# Altium PCB ALIMENTACION FINAL.PcbDoc
Units mm, origin at the board's own origin, x right, y up, seen from the top; angles counter-clockwise.
Board outline 107.98 x 53.29 mm, 2 copper layers (Top Layer, Bottom Layer); 31 components, 18 nets, 67 pads, 0 vias.
Unrouted connection lines stored in the file: 2.
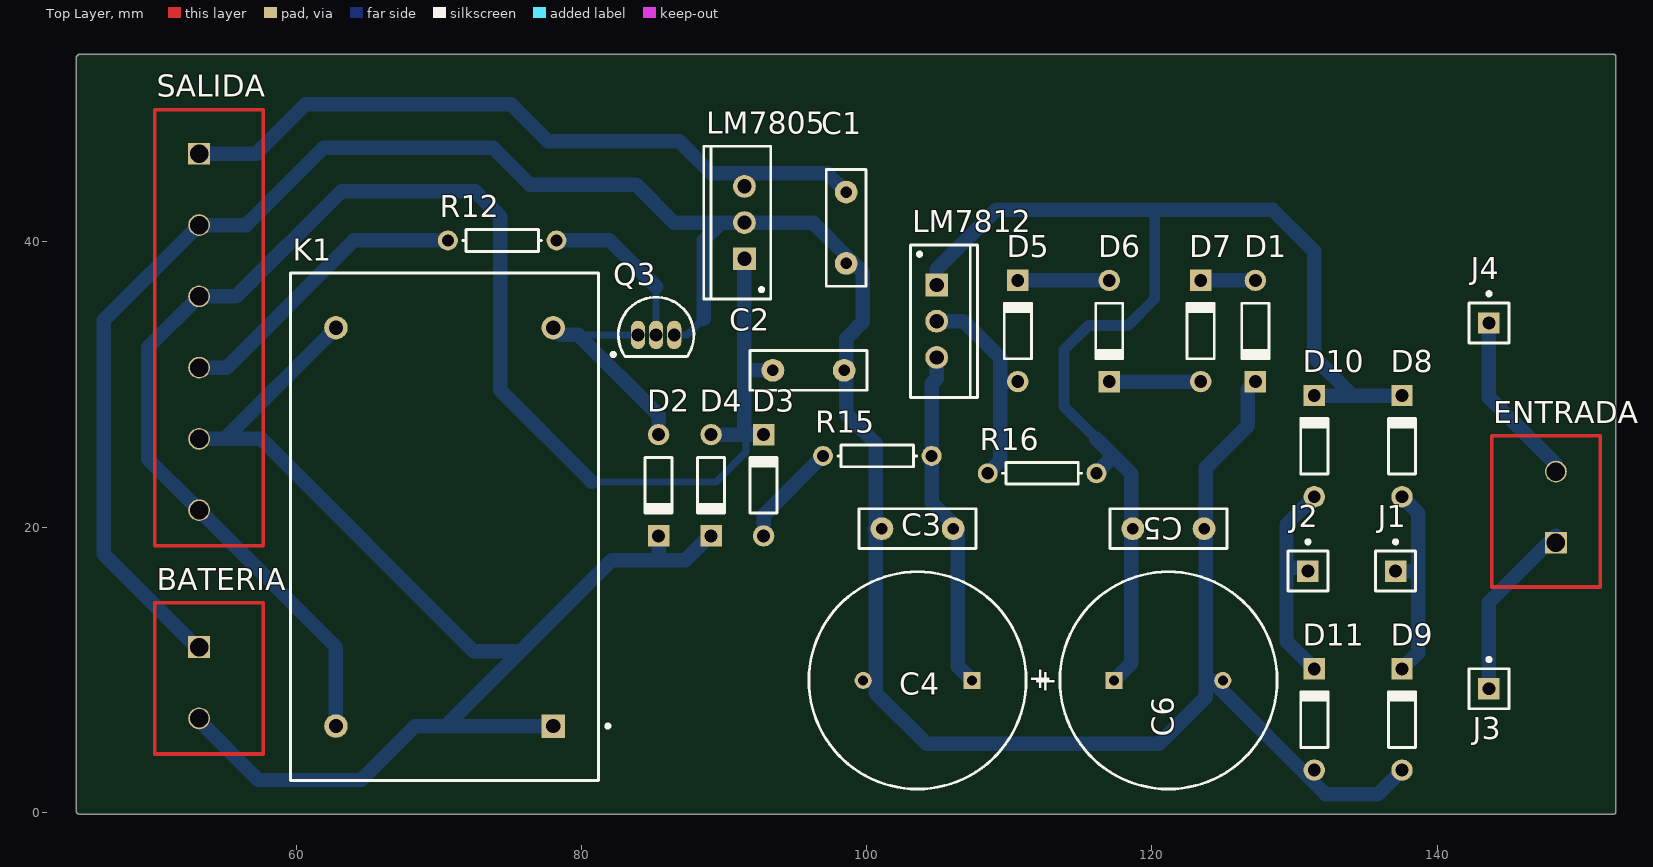
[diagram p0: Top Layer view]
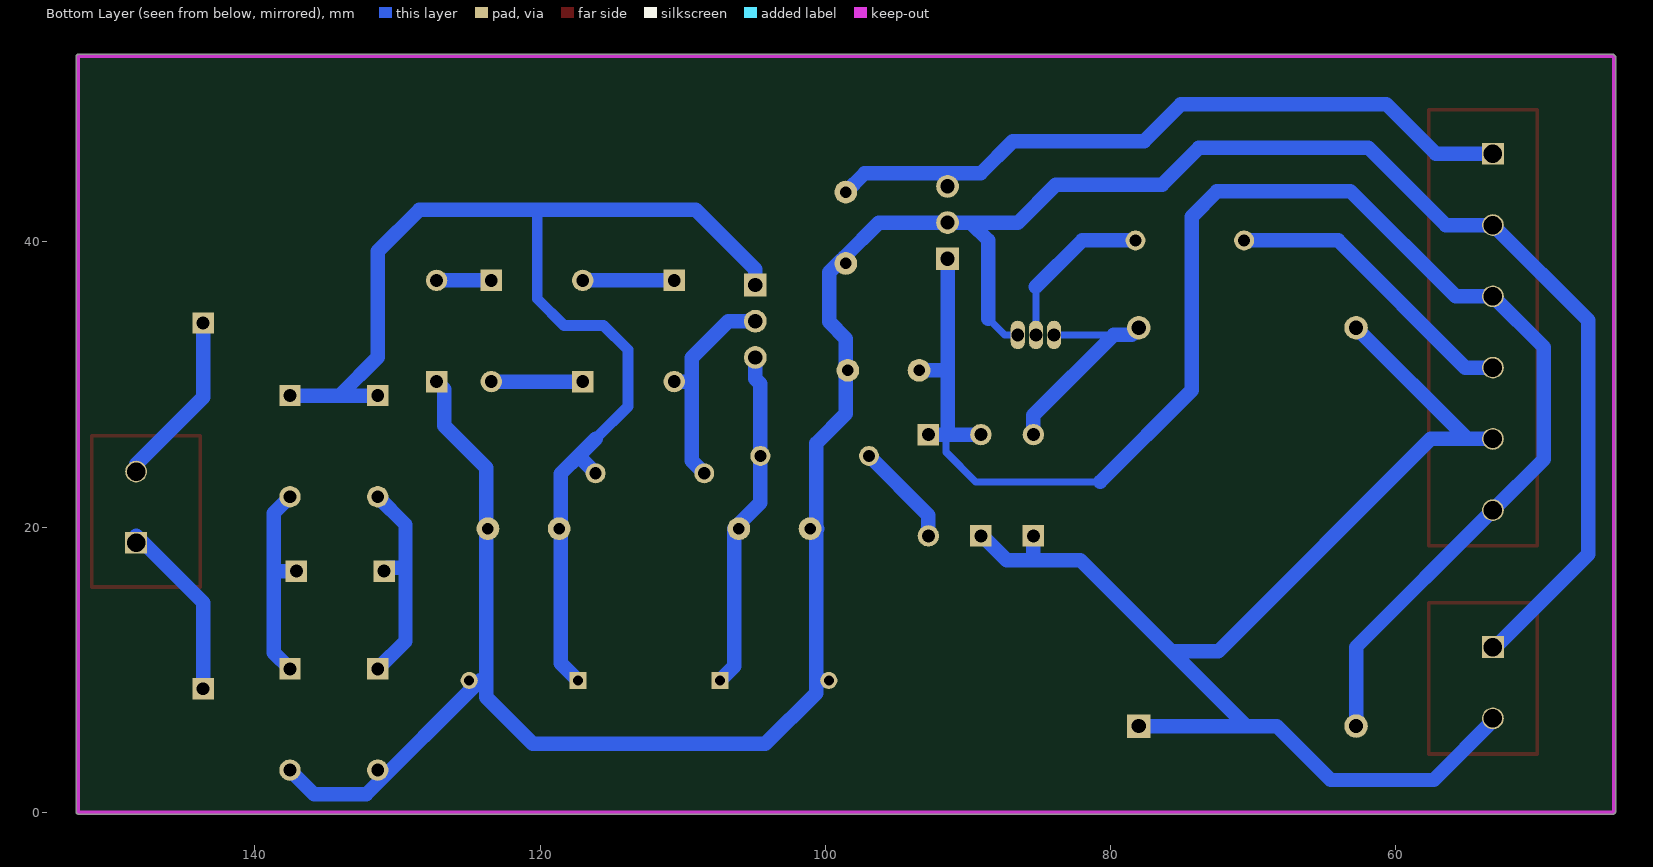
[diagram p1: Bottom Layer view, seen from below]

## Layer stack, top to bottom
Top Solder: solder mask 0.0102, Solder Resist, Dk 3.5
Top Layer: signal copper 0.0356
Dielectric 1: dielectric 0.32, FR-4, Dk 4.8
Bottom Layer: signal copper 0.0356
Bottom Solder: solder mask 0.0102, Solder Resist, Dk 3.5

## Board outline
44.551,0.051 ccw(c44.679,0.051) 44.618,-0.061 ccw(c44.729,0) 44.729,-0.127 152.4,-0.127 ccw(c152.4,0) 152.527,0 152.527,53.035 ccw(c152.4,53.035) 152.4,53.163 44.755,53.163 ccw(c44.755,53.035) 44.635,53.079 ccw(c44.679,52.959) 44.551,52.959

## Design rules (kind name [scope] priority, off if disabled: settings)
Clearance [All vs All     -  WithinRoom('room1')  --  WithinRoom('room2')] p1: gap=2.032 ignorepadtopadclearanceinfootprint=FALSE
PolygonConnect [All] p1: connectstyle=Relief reliefconductorwidth=0.254 reliefentries=4 polygonreliefangle="90 Angle" airgapwidth=0.254
RoomDefinition room2 [InComponentClass('Components Class 2')] p1: confinementstyle=ConfineIn formatcopy=TRUE lockcomponents=FALSE outline 73.533,30.607 99.644,30.607 99.644,48.082 73.533,48.082
RoomDefinition room1 [InComponentClass('Components Class 1')] p2: confinementstyle=ConfineIn formatcopy=TRUE lockcomponents=FALSE outline 112.344,28.245 102.641,28.245 102.641,40.462 112.344,40.462
RoutingVias [All] p1: holewidth=0.711 width=1.27 viastyle="Through Hole" minholewidth=0.711 minwidth=1.27 maxholewidth=0.711 maxwidth=1.27
SolderMaskExpansion [All] p1: expansion=0.102
Width [All] p1: maxlimit=2.032 minlimit=0.508 preferedwidth=1.016
30 further rules are at their usual default settings.

## Classes and differential pairs
component class "Components Class 2": LM7805 Q3
component class "Components Class 1": LM7812

## Components (designator, comment, footprint, x,y, rotation, side; value= is the part's Value field where it differs from the comment)
BATERIA "Header 2" "Bornera 2 pin" 57.662,14.682 r270 top
C1 "Cap" "C Disc 8x2.5-5.0" 98.552,40.996 r90 top value=100pF
C2 "Cap" "C Disc 8x2.5-5.0" 95.91,30.997 r180 top value=100pF
C3 "Cap" "C Disc 8x2.5-5.0" 103.556,19.888 r0 top value=100pF
C4 "Cap Pol1" RB7.6-15 103.556,9.246 r0 top value=100pF
C5 "Cap" "C Disc 8x2.5-5.0" 121.158,19.888 r180 top value=100pF
C6 "Cap Pol1" RB7.6-15 121.158,9.246 r180 top value=100pF
D1 "Diode 1N914" DO-35 127.254,33.757 r270 top
D2 "Diode 1N914" DO-35 85.395,22.936 r270 top
D3 "D Schottky" DO-35 92.761,22.936 r90 top
D4 "Diode 1N914" DO-35 89.078,22.936 r270 top
D5 "Diode 1N914" DO-35 110.592,33.757 r90 top
D6 "Diode 1N914" DO-35 117.005,33.757 r270 top
D7 "Diode 1N914" DO-35 123.419,33.757 r90 top
D8 "Diode 1N914" DO-35 137.541,25.679 r90 top
D9 "Diode 1N914" DO-35 137.541,6.502 r90 top
D10 "Diode 1N914" DO-35 131.387,25.679 r90 top
D11 "Diode 1N914" DO-35 131.387,6.502 r90 top
"ENTRADA 220" "220V" "Bornera 2 pin" 143.836,15.798 r90 top
J1 "Socket" PIN1 137.091,16.916 r0 top
J2 "Socket" PIN1 130.937,16.916 r0 top
J3 "Socket" PIN1 143.637,8.661 r0 top
J4 "Socket" PIN1 143.637,34.315 r0 top
K1 "Relay-SPST" MODULE4 70.383,20.015 r90 top
LM7805 "Volt Reg" TO-220AB 91.415,41.361 r90 top
LM7812 "Volt Reg" TO-220AB 104.902,34.442 r270 top
Q3 "NPN" TO-226-AA 85.217,33.477 r270 top
R12 "Res1" AXIAL-0.3 74.422,40.107 r0 top value=1K
R15 "Res1" AXIAL-0.3 100.736,24.994 r0 top value=1K
R16 "Res1" AXIAL-0.3 112.293,23.774 r0 top value=1K
SALIDA "Header 6" "BORNERA 6 PIN" 57.662,49.287 r270 top

## Footprints (in the part's own frame and the unit in brackets; to place one, negate y for a bottom-side part, rotate by r counter-clockwise, add the part's x,y. Pads: shape width x height; smd on the part's side, far side on the other; paste and mask are expansions set on the pad)
AXIAL-0.3 [mm] "Axial Device, Thru-Hole; 2 Leads; 0.3 in Pin Spacing"
  round 1.4 hole 0.85: 1(-3.81,0) 2(3.81,0)
  silkscreen extent -2.77,-0.76 2.77,0.76
"Bornera 2 pin" [mm]
  rect 1.524x1.524 hole 1.3: 1(3.1,-4.5)
  round 1.524 hole 1.3: 2(8.1,-4.5)
  Top Layer lines w0.254: 10.6,-7.6 0,-7.6 0,0 10.6,0 10.6,-7.6
"BORNERA 6 PIN" [mm]
  rect 1.524x1.524 hole 1.3: 1(3.1,-4.5)
  round 1.524 hole 1.3: 2(8.1,-4.5) 3(13.1,-4.5) 4(18.1,-4.5) 5(23.1,-4.5) 6(28.1,-4.5)
  Top Layer lines w0.254: 30.6,-7.6 30.6,0 0,0 0,-7.6 30.6,-7.6
"C Disc 8x2.5-5.0" [mm] "C Disc 5x2.5-5.0"
  round 1.6 hole 0.8: 1(-2.5,0) 2(2.5,0)
  silkscreen extent -4.1,-1.4 4.1,1.4, body extent -3.99,-1.29 3.99,1.29, height 8.05
DO-35 [mm] "Diode, Axial; Body 3.8 x 1.9 mm (LxDia. max), Lead Dia. 0.53 mm (max)"
  round 1.5 hole 0.9: 1(-3.55,0)
  rect 1.5x1.5 hole 0.9: 2(3.55,0)
  silkscreen extent -1.95,-0.95 2.05,0.95
MODULE4 [mm] "DIP; 4 Round Pins; Row Space 27.94 mm; Pitch 15.24 mm"
  rect 1.65x1.65 hole 1: 1(-13.97,-7.62)
  round 1.65 hole 1: 2(-13.97,7.62) 3(13.97,-7.62) 4(13.97,7.62)
  silkscreen extent -17.8,-11.58 17.8,10.8, body extent -17.8,-10.8 17.8,10.8, height 14
PIN1 [mm] "Connector; Plug"
  rect 1.5x1.5 hole 0.9: 1(0,0)
  silkscreen extent -1.4,-1.4 1.4,2.17
RB7.6-15 [mm] "Polarized Capacitor (Radial); 2 Leads"
  rect 1.2x1.2 hole 0.7: 1(3.81,0)
  round 1.2 hole 0.7: 2(-3.81,0)
  silkscreen extent -7.62,-7.62 7.62,7.62
TO-220AB [mm] "TO, Thru-Hole, Vertical, Heatsink Mounted; 3 In-Line Leads; Pitch 2.54 mm"
  rect 1.6x1.6 hole 1: 1(-2.54,0)
  round 1.6 hole 1: 2(0,0) 3(2.54,0)
  silkscreen extent -5.35,-1.85 5.35,2.85, body extent -5.4,-1.9 5.4,2.9, height 19.3
TO-226-AA [mm] "TO, Flat Index; 3 In-Line, Axial Leads; Body Dia. 4.8mm; Leads 0.55 x 0.51 mm (max)"
  oval 2x1 hole 0.9: 1(0,-1.27) 2(0,0) 3(0,1.27)
  silkscreen extent -2.65,-3.13 1.52,2.65, body extent -2.65,-2.66 1.52,2.66, height 5.33

## Part data
BATERIA: "Header, 2-Pin", LatestRevisionDate=17-Jul-2002, LatestRevisionNote="Re-released for DXP Platform.", Publisher="Altium Limited"
C1 C2 C3 C5: "Capacitor", LatestRevisionDate=17-Jul-2002, LatestRevisionNote="Re-released for DXP Platform.", PackageDescription="Radial Cap, Thru-Hole; 2 Leads; 0.3 in Pin Spacing", PackageReference=RAD-0.3, Published=8-Jun-2000, Publisher="Altium Limited"
C4 C6: "Polarized Capacitor (Radial)", LatestRevisionDate=17-Jul-2002, LatestRevisionNote="Re-released for DXP Platform.", PackageDescription="Polarized Capacitor (Radial); 2 Leads", PackageReference=RB7.6-15, Published=8-Jun-2000, Publisher="Altium Limited"
D1 D2 D4 D5 D6 D7 D8 D9 D10 D11: "High Conductance Fast Diode", Code_JEDEC=DO-204-AH, ComponentLink1Description="Manufacturer Link", ComponentLink1URL=http://www.fairchildsemi.com/, ComponentLink2Description=Datasheet, ComponentLink2URL=http://www.fairchildsemi.com/ds/1N%2F1N4448.pdf, DatasheetVersion=1997, LatestRevisionDate=17-Jul-2002, LatestRevisionNote="Re-released for DXP Platform.", PackageDescription="Diode, Axial; Body 3.8 x 1.9 mm (LxDia. max), Lead Dia. 0.53 mm (max)", PackageReference=DO-35, Published=8-Jun-2000, Publisher="Altium Limited"
D3: "Schottky Diode", Code_JEDEC=DO-214-AA, LatestRevisionDate=17-Jul-2002, LatestRevisionNote="Re-released for DXP Platform.", PackageDescription="DO-214-AA/SMB; 2 C-Bend Leads; Body 5.3 x 3.6 mm, inc. leads (LxW)", PackageReference=SMB, Published=8-Jun-2000, Publisher="Altium Limited"
"ENTRADA 220": library part "Header 2", "Header, 2-Pin", LatestRevisionDate=17-Jul-2002, LatestRevisionNote="Re-released for DXP Platform.", Publisher="Altium Limited"
K1: "Single-Pole Single-Throw Relay", LatestRevisionDate=17-Jul-2002, LatestRevisionNote="Re-released for DXP Platform.", PackageReference=MODULE4, Published=24-Mar-1999, Publisher="Altium Limited"
LM7805 LM7812: "Voltage Regulator", LatestRevisionDate=29-May-2009, LatestRevisionNote="IPC-7351 Footprint Added.", PackageDescription="3-Pin Transistor Outline Package 2.54 mm Pitch, 15.1 mm Lead Span", PackageReference=D2PAK, Published=24-Mar-1999, Publisher="Altium Limited"
Q3: "NPN Bipolar Transistor", Code_JEDEC=TO-226-AA, LatestRevisionDate=17-Jul-2002, LatestRevisionNote="Re-released for DXP Platform.", PackageDescription="TO, Flat Index; 3 In-Line, Axial Leads; Body Dia. 4.8mm; Leads 0.55 x 0.51 mm (max)", PackageReference=TO-226-AA, Published=8-Jun-2000, Publisher="Altium Limited"
R12 R15 R16: "Resistor", LatestRevisionDate=17-Jul-2002, LatestRevisionNote="Re-released for DXP Platform.", PackageDescription="Axial Device, Thru-Hole; 2 Leads; 0.3 in Pin Spacing", PackageReference=AXIAL-0.3, Published=8-Jun-2000, Publisher="Altium Limited"
SALIDA: "Header, 6-Pin", LatestRevisionDate=17-Jul-2002, LatestRevisionNote="Re-released for DXP Platform.", Publisher="Altium Limited"
J1 J2 J3 J4: LatestRevisionDate=17-Jul-2002, LatestRevisionNote="Re-released for DXP Platform.", Publisher="Altium Limited"

## Nets (pads, with @x,y where several pads share a name; then routed paths per layer and width w, separated by ;. In a path a pad name is that pad's centre, name@x,y a point inside that pad or via, vN(x,y) a via of type N, cw(c..) or ccw(c..) an arc to the next point about the centre after c; other vN are vias at no path point)
"13,8 V": BATERIA.2 D2.2 D4.2 K1.1 K1.4 SALIDA.5 | length 94
  Bottom Layer w1.016: BATERIA.2@52.984,6.582 57.306,2.261 64.541,2.261 68.326,6.045 70.46,6.045 ; SALIDA.5 54.966,26.187 ; K1.4 54.966,26.187 ; K1.1 70.46,6.045 ; D2.2 85.395,17.755 85.319,17.678 ; D4.2 88.982,19.386 87.274,17.678 85.319,17.678 ; 54.966,26.187 57.531,26.187 72.441,11.278 75.692,11.278 ; 70.46,6.045 75.692,11.278 ; 75.692,11.278 82.093,17.678 85.319,17.678
"14,5 V": C2.2 D3.2 D4.1 K1.2 LM7805.1 SALIDA.3 SALIDA.6 | length 114.2
  Bottom Layer w0.508: 80.721,23.165 89.439,23.165 91.516,25.242 91.516,26.486
  Bottom Layer w1.016: K1.2 62.763,11.586 SALIDA.6 49.606,24.743 49.606,32.631 SALIDA.3 55.778,36.187 63.152,43.561 72.517,43.561 74.295,41.783 74.295,29.591 80.721,23.165 ; D4.1 91.516,26.486 ; LM7805.1 91.415,30.963 ; D3.2 91.516,26.486 ; C2.2 91.449,30.997 91.415,30.963 ; 91.415,30.963 91.415,26.588 91.516,26.486
"14,8 V": C3.2 C4.1 LM7812.3 R15.2 | length 24
  Bottom Layer w1.016: LM7812.3 104.902,30.404 104.546,30.048 R15.2 104.546,21.717 106.375,19.888 106.375,10.236 C4.1
GND: BATERIA.1 C1.1 C2.1 C3.1 C4.2 C5.1 C6.2 D1.2 D9.1 D11.1 LM7805.2 Q3.3 SALIDA.2 | length 196.8
  Bottom Layer w0.508: Q3.3 87.401,33.477 88.544,34.62
  Bottom Layer w1.016: BATERIA.1@52.984,11.582 46.482,18.085 46.482,34.507 SALIDA.2 56.468,41.187 61.889,46.609 73.78,46.609 76.37,44.018 83.82,44.018 86.478,41.361 89.798,41.361 ; 88.544,34.62 88.544,40.107 89.798,41.361 ; C1.1 C1.1@98.552,38.786 ; C2.1@98.638,30.997 C2.1@98.552,30.912 ; C1.1@98.679,38.913 96.231,41.361 LM7805.2 89.798,41.361 ; C1.1@98.824,38.768 99.72,37.871 99.72,34.392 98.552,33.223 C2.1@98.552,30.912 ; C4.2 100.609,9.246 100.635,9.22 ; C3.1@100.559,19.888 C3.1@100.635,19.964 ; C5.1@123.825,19.888 C5.1@123.774,19.939 ; D1.2 126.709,29.661 126.709,27.103 123.774,24.169 C5.1@123.774,19.939 ; D9.1 135.833,1.245 132.207,1.245 124.206,9.246 123.774,9.246 ; C2.1@98.552,30.912 98.552,27.95 100.635,25.867 C3.1@100.635,19.964 ; 100.635,9.22 C3.1@100.635,19.964 ; 100.635,9.22 100.635,8.357 104.191,4.801 120.523,4.801 123.774,8.052 123.774,9.246 ; 123.774,9.246 C5.1@123.774,19.939
NetC1_2: C1.2 LM7805.3 SALIDA.1 | length 49.4
  Bottom Layer w1.016: SALIDA.1 57.157,46.187 60.627,49.657 75.042,49.657 77.633,47.066 86.843,47.066 89.103,44.806 97.242,44.806 C1.2
NetC5_2: C5.2 C6.1 D8.2 D10.2 LM7812.1 R16.2 | length 88.7
  Bottom Layer w0.762: 116.103,26.196 113.842,28.457 113.842,32.437 115.549,34.144 118.315,34.144 120.193,36.021 120.193,42.266
  Bottom Layer w1.016: 104.902,37.782 104.902,38.1 109.068,42.266 120.193,42.266 128.459,42.266 131.387,39.337 131.387,31.91 134.067,29.229 ; R16.2 117.263,24.934 117.263,25.036 ; 116.103,26.196 117.263,25.036 ; C6.1 118.542,10.439 C5.2@118.542,20.015 ; C5.2@118.415,19.888 C5.2@118.542,20.015 ; D10.2 134.067,29.229 ; D8.2 134.067,29.229 ; 117.263,25.036 118.542,23.757 C5.2@118.542,20.015
NetD1_1: D1.1 D7.2 | length 3.8
  Bottom Layer w1.016: D7.2 D1.1
NetD2_1: D2.1 K1.3 Q3.1 | length 15.5
  Bottom Layer w0.508: K1.3 K1.3@78.511,33.477 ; 79.756,33.477 Q3.1
  Bottom Layer w1.016: K1.3@78.511,33.477 79.756,33.477 85.395,27.838 D2.1
NetD3_1: D3.1 R15.1 | length 7.3
  Bottom Layer w1.016: D3.1 92.761,20.828 R15.1
NetD5_1: D5.1 LM7812.2 R16.1 | length 15.3
  Bottom Layer w1.016: LM7812.2 106.807,34.442 109.372,31.877 109.372,30.353 ; R16.1 109.372,24.663 109.372,30.353 ; D5.1 109.519,30.207 109.372,30.353
NetD5_2: D5.2 D6.1 | length 6.4
  Bottom Layer w1.016: D5.2 D6.1
NetD6_2: D6.2 D7.1 | length 6.4
  Bottom Layer w1.016: D6.2 D7.1
NetD8_1: D8.1 D9.2 J1.1 | length 14.6
  Bottom Layer w1.016: J1.1 138.684,16.916 ; D9.2 138.684,11.195 138.684,16.916 ; D8.1 138.684,20.986 138.684,16.916
NetD10_1: D10.1 D11.2 J2.1 | length 15.3
  Bottom Layer w1.016: J2.1 130.708,17.145 129.438,17.145 ; D11.2 129.438,12.001 129.438,17.145 ; D10.1 129.438,20.181 129.438,17.145
"NetENTRADA 220_1": "ENTRADA 220.1" J3.1 | length 12.7
  Bottom Layer w1.016: J3.1 143.637,14.71 148.336,19.409
"NetENTRADA 220_2": "ENTRADA 220.2" J4.1 | length 11.9
  Bottom Layer w1.016: J4.1 143.637,29.108 148.336,24.409
NetQ3_2: Q3.2 R12.2 | length 11.7
  Bottom Layer w0.508: Q3.2 85.217,36.855
  Bottom Layer w1.016: R12.2 81.966,40.107 85.217,36.855
NetR12_1: R12.1 SALIDA.4 | length 21.1
  Bottom Layer w1.016: SALIDA.4 55.089,31.187 64.008,40.107 R12.1

## Keep-outs
Bottom Layer:
  lines w0.254: 44.679,0.051 44.729,0 152.4,0 152.4,53.035 44.755,53.035 44.679,52.959 44.679,0.051

## Text inside footprints (layer, text, board x,y; h text height)
C4: Top Overlay "+" at 111.688,8.509 h1.5
C6: Top Overlay "+" at 113.026,9.982 h1.5 r180